# Altium PCB PCB_2021-08-01.pcbdoc
Units mil, origin at the board's own origin, x right, y up, seen from the top; angles counter-clockwise.
Board outline 6165 x 3156.77 mil, 2 copper layers (Top Layer, Bottom Layer); 22 components, 6 nets, 625 pads, 4 vias.
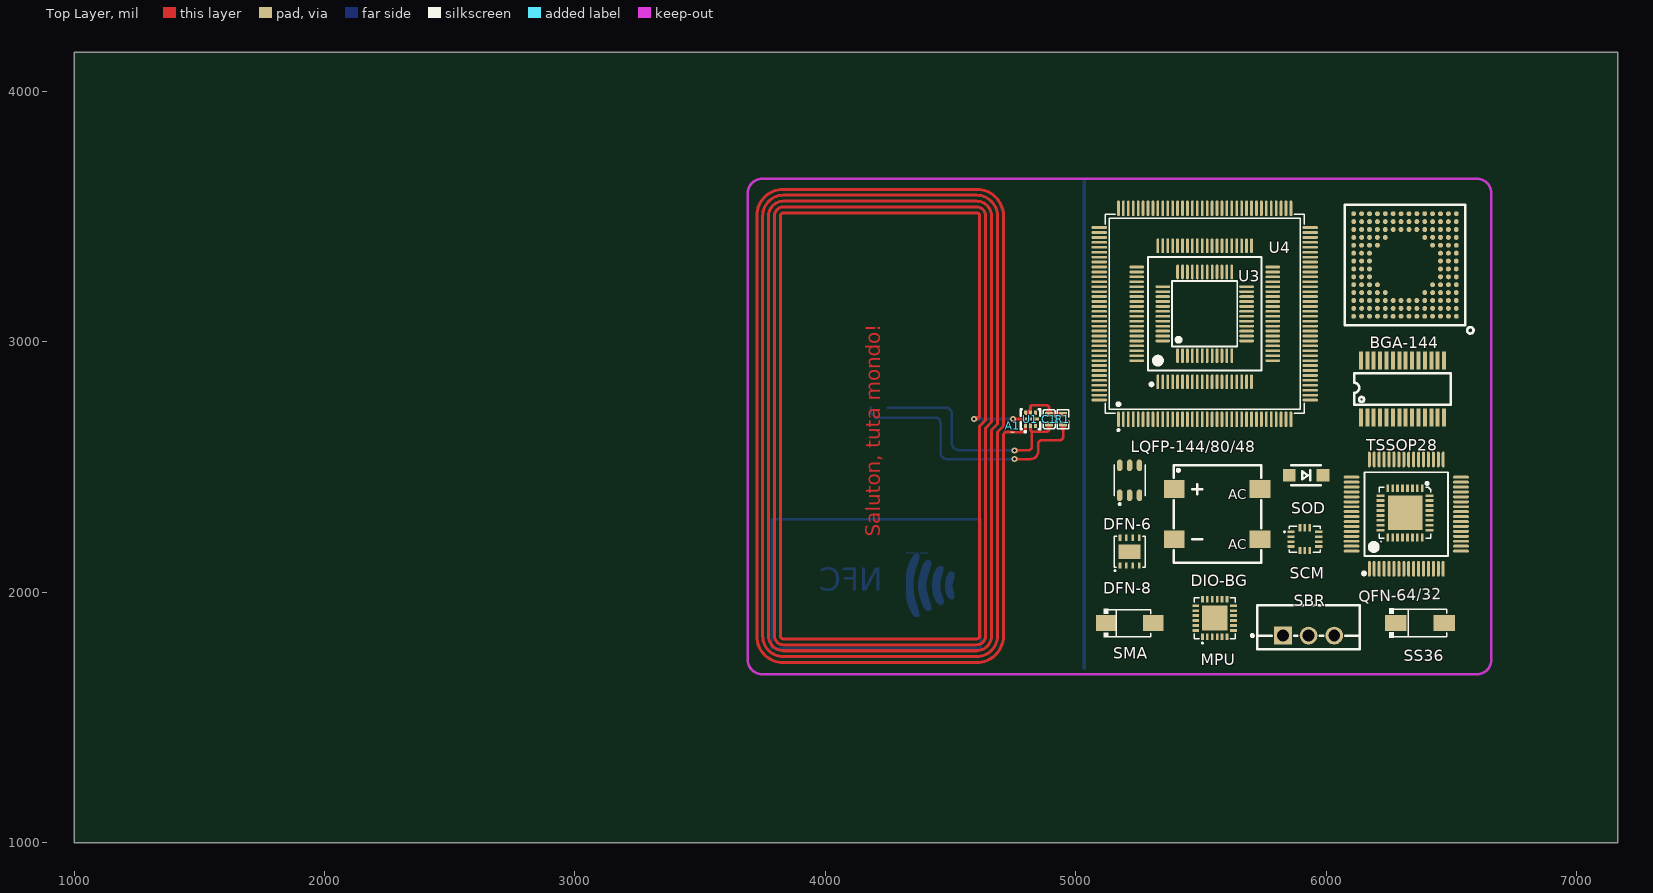
[diagram p0: Top Layer view]
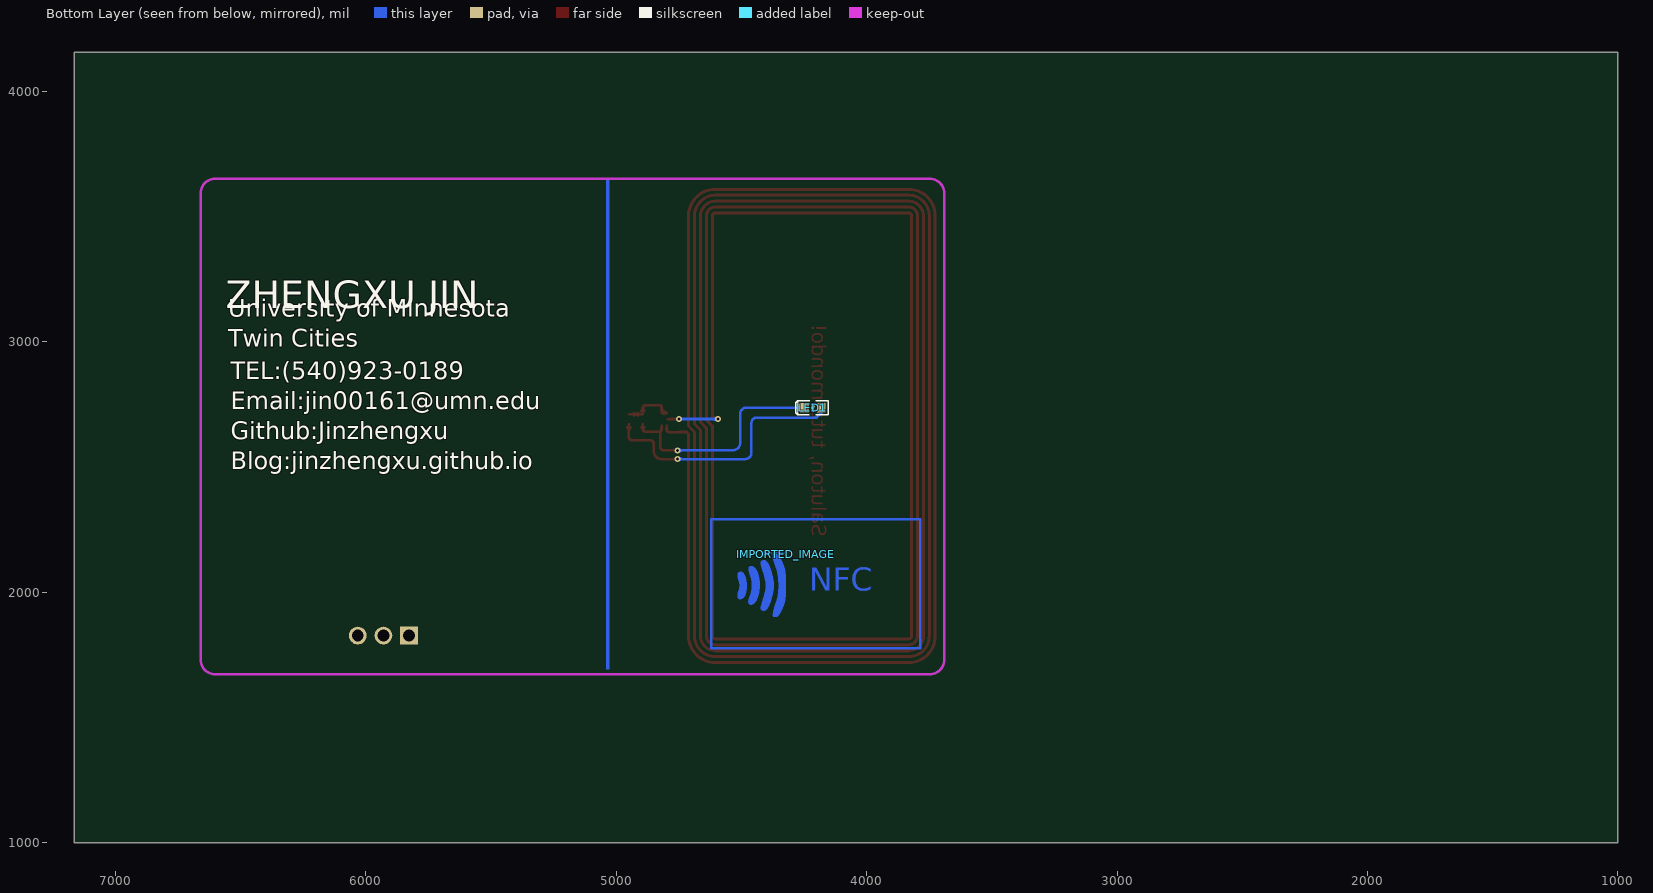
[diagram p1: Bottom Layer view, seen from below]

## Layer stack, top to bottom
Top Layer: signal copper (thickness not stored)
Dielectric: dielectric 12.6, FR-4, Dk 4.8
Bottom Layer: signal copper (thickness not stored)

## Board outline
7165,1000 1000,1000 1000,4156.77 7165,4156.77

## Components (designator, comment, footprint, x,y, rotation, side; value= is the part's Value field where it differs from the comment)
. "QFN-32_L5.0-W5.0-P0.50-BL-EP3.4" QFN-32_L5.0-W5.0-P0.50-BL-EP3.4 6315,2316.77 r180 top
A1 "NFC_ANTENNA" NFC天线 4178.84,2641.01 r180 top
BGA-144 "BGA-144_L12.1-W12.1-P0.80-BR_TMS320C5535AZHHA10" BGA-144_L12.1-W12.1-P0.80-BR_TMS320C5535AZHHA10 6315,3306.77 r0 top
C1 "0.1u" C0402 4893.84,2691.01 r270 top
DFN-6 "DFN-6_L3.0-W3.0-P1.00-BL" DFN-6_L3.0-W3.0-P1.00-BL 5215,2446.77 r0 top
DFN-8 "DFN-8_L3.0-W3.0-P0.65-BL-EP" DFN-8_L3.0-W3.0-P0.65-BL-EP 5215,2161.77 r0 top
DIO-BG "DIO-BG-TH_TTF" DIO-BG-TH_TTF 5565,2311.77 r0 top
IMPORTED_IMAGE "IMPORTED_IMAGE" IMPORTED_IMAGE 4323.05,2152.5 r0 bottom
LED1 "LED-0603_R" LED0603_RED 4215,2736.77 r180 bottom
LQFP-144/80/48 "LQFP-144_L20.0-W20.0-P0.50-LS22.0-BL" LQFP-144_L20.0-W20.0-P0.50-LS22.0-BL 5515,3111.77 r0 top
MPU "QFN-24_L4.0-W4.0-P0.50-BL-EP2.6" QFN-24_L4.0-W4.0-P0.50-BL-EP2.6 5555,1896.77 r0 top
QFN-64/32 "LQFP-64_L10.0-W10.0-P0.50-LS12.0-BL" LQFP-64_L10.0-W10.0-P0.50-LS12.0-BL 6320,2311.77 r0 top
R1 "47" R0402 4948.84,2691.01 r270 top
SBR "ITO-220AB-3_L10.2-W4.5-P2.60-L" ITO-220AB-3_L10.2-W4.5-P2.60-L 5930,1826.77 r0 top
SCM "LGA-14_L3.0-W2.5-P0.50-TL" LGA-14_L3.0-W2.5-P0.50-TL 5915,2211.77 r0 top
SMA "SMA_L4.3-W2.6-LS5.0-RD" SMA_L4.3-W2.6-LS5.0-RD 5215,1876.77 r0 top
SOD "SOD-123FL_L2.6-W1.6-LS3.4-R-RD" SOD-123FL_L2.6-W1.6-LS3.4-R-RD 5920,2466.77 r0 top
SS36 "SMA_L4.4-W2.6-LS5.0-RD" SMA_L4.4-W2.6-LS5.0-RD 6375,1876.77 r0 top
TSSOP28 "TSSOP-28_L9.8-W3.0-P0.66-LS6.4-BL" TSSOP-28_L9.8-W3.0-P0.66-LS6.4-BL 6305,2811.77 r0 top
U1 "NT3H1101W0FHKH" XQFN-8_L1.6-W1.6-P0.50-BR 4818.84,2691.01 r270 top
U3 "LQFP-48_L7.0-W7.0-P0.50-LS9.0-BL" LQFP-48_L7.0-W7.0-P0.50-LS9.0-BL 5515,3111.77 r0 top
U4 "LQFP-80_L12.0-W12.0-P0.50-LS14.0-BL" LQFP-80_L12.0-W12.0-P0.50-LS14.0-BL 5515,3111.77 r0 top

## Footprints (in the part's own frame and the unit in brackets; to place one, negate y for a bottom-side part, rotate by r counter-clockwise, add the part's x,y. Pads: shape width x height; smd on the part's side, far side on the other; paste and mask are expansions set on the pad)
BGA-144_L12.1-W12.1-P0.80-BR_TMS320C5535AZHHA10 [mm]
  round 0.5 smd: A1(5.2,-5.2) A2(4.4,-5.2) A3(3.6,-5.2) A4(2.8,-5.2) A5(2,-5.2) A6(1.2,-5.2) A7(0.4,-5.2) A8(-0.4,-5.2) A9(-1.2,-5.2) A10(-2,-5.2) A11(-2.8,-5.2) A12(-3.6,-5.2) A13(-4.4,-5.2) A14(-5.2,-5.2) B1(5.2,-4.4) B2(4.4,-4.4) B3(3.6,-4.4) B4(2.8,-4.4) B5(2,-4.4) B6(1.2,-4.4) B7(0.4,-4.4) B8(-0.4,-4.4) B9(-1.2,-4.4) B10(-2,-4.4) B11(-2.8,-4.4) B12(-3.6,-4.4) B13(-4.4,-4.4) B14(-5.2,-4.4) C1(5.2,-3.6) C2(4.4,-3.6) C3(3.6,-3.6) C4(2.8,-3.6) C5(2,-3.6) C6(1.2,-3.6) C7(0.4,-3.6) C8(-0.4,-3.6) C9(-1.2,-3.6) C10(-2,-3.6) C11(-2.8,-3.6) C12(-3.6,-3.6) C13(-4.4,-3.6) C14(-5.2,-3.6) D1(5.2,-2.8) D2(4.4,-2.8) D3(3.6,-2.8) D4(2.8,-2.8) D5(2,-2.8) D10(-2,-2.8) D11(-2.8,-2.8) D12(-3.6,-2.8) D13(-4.4,-2.8) D14(-5.2,-2.8) E1(5.2,-2) E2(4.4,-2) E3(3.6,-2) E4(2.8,-2) E11(-2.8,-2) E12(-3.6,-2) E13(-4.4,-2) E14(-5.2,-2) F1(5.2,-1.2) F2(4.4,-1.2) F3(3.6,-1.2) F12(-3.6,-1.2) F13(-4.4,-1.2) F14(-5.2,-1.2) G1(5.2,-0.4) G2(4.4,-0.4) G3(3.6,-0.4) G12(-3.6,-0.4) G13(-4.4,-0.4) G14(-5.2,-0.4) H1(5.2,0.4) H2(4.4,0.4) H3(3.6,0.4) H12(-3.6,0.4) H13(-4.4,0.4) H14(-5.2,0.4) J1(5.2,1.2) J2(4.4,1.2) J3(3.6,1.2) J12(-3.6,1.2) J13(-4.4,1.2) J14(-5.2,1.2) K1(5.2,2) K2(4.4,2) K3(3.6,2) K4(2.8,2) K11(-2.8,2) K12(-3.6,2) K13(-4.4,2) K14(-5.2,2) L1(5.2,2.8) L2(4.4,2.8) L3(3.6,2.8) L4(2.8,2.8) L5(2,2.8) L10(-2,2.8) L11(-2.8,2.8) L12(-3.6,2.8) L13(-4.4,2.8) L14(-5.2,2.8) M1(5.2,3.6) M2(4.4,3.6) M3(3.6,3.6) M4(2.8,3.6) M5(2,3.6) M6(1.2,3.6) M7(0.4,3.6) M8(-0.4,3.6) M9(-1.2,3.6) M10(-2,3.6) M11(-2.8,3.6) M12(-3.6,3.6) M13(-4.4,3.6) M14(-5.2,3.6) N1(5.2,4.4) N2(4.4,4.4) N3(3.6,4.4) N4(2.8,4.4) N5(2,4.4) N6(1.2,4.4) N7(0.4,4.4) N8(-0.4,4.4) N9(-1.2,4.4) N10(-2,4.4) N11(-2.8,4.4) N12(-3.6,4.4) N13(-4.4,4.4) N14(-5.2,4.4) P1(5.2,5.2) P2(4.4,5.2) P3(3.6,5.2) P4(2.8,5.2) P5(2,5.2) P6(1.2,5.2) P7(0.4,5.2) P8(-0.4,5.2) P9(-1.2,5.2) P10(-2,5.2) P11(-2.8,5.2) P12(-3.6,5.2) P13(-4.4,5.2) P14(-5.2,5.2)
  silkscreen extent -6.1,-6.95 6.95,6.1
C0402 [mm]
  rect 0.5x0.8 smd: 1(-0.5,0) 2(0.5,0)
  silkscreen extent -0.95,-0.6 0.95,0.6
DFN-6_L3.0-W3.0-P1.00-BL [mm]
  oval 0.56x1.185 smd: 1(-1,-1.517) 2(0,-1.517) 3(1,-1.517) 4(1,1.517) 5(0,1.517) 6(-1,1.517)
  silkscreen extent -1.58,-2.51 1.58,1.58
DFN-8_L3.0-W3.0-P0.65-BL-EP [mm]
  rect 0.28x0.625 smd: 1(-0.975,-1.412) 2(-0.325,-1.412) 3(0.325,-1.412) 4(0.975,-1.412) 5(0.975,1.412) 6(0.325,1.412) 7(-0.325,1.412) 8(-0.975,1.412)
  rect 2.25x1.5 smd: 9(0,0)
  silkscreen extent -1.58,-2.01 1.58,1.58
DIO-BG-TH_TTF [mm]
  rect 2.1x1.8 smd: 1(-4.35,2.55) 2(-4.35,-2.55) 3(4.35,-2.55) 4(4.35,2.55)
  silkscreen extent -4.4,-4.95 4.44,4.95
IMPORTED_IMAGE [mil]
  Top Layer region: 493 vertices and 0 holes, not listed, extent 0,0 51.95,251.53
  Top Layer region: 398 vertices and 0 holes, not listed, extent 47.48,24.87 99.83,226.52
  Top Layer region: 451 vertices and 0 holes, not listed, extent 104.06,48.81 148.98,202.28
  Top Layer region: 291 vertices and 0 holes, not listed, extent 155.96,71.09 192.67,180.08
ITO-220AB-3_L10.2-W4.5-P2.60-L [mm]
  rect 1.8x1.8 hole 1.2: 1(-2.6,0)
  round 1.8 hole 1.2: 2(0,0) 3(2.6,0)
  silkscreen extent -5.84,-1.4 5.2,3.1
LED0603_RED [mm]
  rect 0.9x1 smd: 1(0.85,0) 2(-0.85,0)
  silkscreen extent -1.75,-0.73 1.54,0.73
LGA-14_L3.0-W2.5-P0.50-TL [mm]
  rect 0.745x0.28 smd: 1(-1.398,0.75) 2(-1.398,0.25) 3(-1.398,-0.25) 4(-1.398,-0.75) 8(1.398,-0.75) 9(1.398,-0.25) 10(1.398,0.25) 11(1.398,0.75)
  rect 0.28x0.745 smd: 5(-0.5,-1.147) 6(0,-1.147) 7(0.5,-1.147) 12(0.5,1.147) 13(0,1.147) 14(-0.5,1.147)
  silkscreen extent -2.14,-1.33 1.58,1.33
LQFP-48_L7.0-W7.0-P0.50-LS9.0-BL [mm]
  oval 0.27x1.5 smd: 1(-2.75,-4.25) 2(-2.25,-4.25) 3(-1.75,-4.25) 4(-1.25,-4.25) 5(-0.75,-4.25) 6(-0.25,-4.25) 7(0.25,-4.25) 8(0.75,-4.25) 9(1.25,-4.25) 10(1.75,-4.25) 11(2.25,-4.25) 12(2.75,-4.25) 25(2.75,4.25) 26(2.25,4.25) 27(1.75,4.25) 28(1.25,4.25) 29(0.75,4.25) 30(0.25,4.25) 31(-0.25,4.25) 32(-0.75,4.25) 33(-1.25,4.25) 34(-1.75,4.25) 35(-2.25,4.25) 36(-2.75,4.25)
  oval 1.5x0.27 smd: 13(4.25,-2.75) 14(4.25,-2.25) 15(4.25,-1.75) 16(4.25,-1.25) 17(4.25,-0.75) 18(4.25,-0.25) 19(4.25,0.25) 20(4.25,0.75) 21(4.25,1.25) 22(4.25,1.75) 23(4.25,2.25) 24(4.25,2.75) 37(-4.25,2.75) 38(-4.25,2.25) 39(-4.25,1.75) 40(-4.25,1.25) 41(-4.25,0.75) 42(-4.25,0.25) 43(-4.25,-0.25) 44(-4.25,-0.75) 45(-4.25,-1.25) 46(-4.25,-1.75) 47(-4.25,-2.25) 48(-4.25,-2.75)
  silkscreen extent -3.33,-3.31 3.3,3.34
LQFP-64_L10.0-W10.0-P0.50-LS12.0-BL [mm]
  oval 0.3x1.6 smd: 1(-3.75,-5.55) 2(-3.25,-5.55) 3(-2.75,-5.55) 4(-2.25,-5.55) 5(-1.75,-5.55) 6(-1.25,-5.55) 7(-0.75,-5.55) 8(-0.25,-5.55) 9(0.25,-5.55) 10(0.75,-5.55) 11(1.25,-5.55) 12(1.75,-5.55) 13(2.25,-5.55) 14(2.75,-5.55) 15(3.25,-5.55) 16(3.75,-5.55) 33(3.75,5.55) 34(3.25,5.55) 35(2.75,5.55) 36(2.25,5.55) 37(1.75,5.55) 38(1.25,5.55) 39(0.75,5.55) 40(0.25,5.55) 41(-0.25,5.55) 42(-0.75,5.55) 43(-1.25,5.55) 44(-1.75,5.55) 45(-2.25,5.55) 46(-2.75,5.55) 47(-3.25,5.55) 48(-3.75,5.55)
  oval 1.6x0.3 smd: 17(5.55,-3.75) 18(5.55,-3.25) 19(5.55,-2.75) 20(5.55,-2.25) 21(5.55,-1.75) 22(5.55,-1.25) 23(5.55,-0.75) 24(5.55,-0.25) 25(5.55,0.25) 26(5.55,0.75) 27(5.55,1.25) 28(5.55,1.75) 29(5.55,2.25) 30(5.55,2.75) 31(5.55,3.25) 32(5.55,3.75) 49(-5.55,3.75) 50(-5.55,3.25) 51(-5.55,2.75) 52(-5.55,2.25) 53(-5.55,1.75) 54(-5.55,1.25) 55(-5.55,0.75) 56(-5.55,0.25) 57(-5.55,-0.25) 58(-5.55,-0.75) 59(-5.55,-1.25) 60(-5.55,-1.75) 61(-5.55,-2.25) 62(-5.55,-2.75) 63(-5.55,-3.25) 64(-5.55,-3.75)
  silkscreen extent -4.43,-6.16 4.25,4.25
LQFP-80_L12.0-W12.0-P0.50-LS14.0-BL [mm]
  oval 0.28x1.5 smd: 1(-4.75,-6.9) 2(-4.25,-6.9) 3(-3.75,-6.9) 4(-3.25,-6.9) 5(-2.75,-6.9) 6(-2.25,-6.9) 7(-1.75,-6.9) 8(-1.25,-6.9) 9(-0.75,-6.9) 10(-0.25,-6.9) 11(0.25,-6.9) 12(0.75,-6.9) 13(1.25,-6.9) 14(1.75,-6.9) 15(2.25,-6.9) 16(2.75,-6.9) 17(3.25,-6.9) 18(3.75,-6.9) 19(4.25,-6.9) 20(4.75,-6.9) 41(4.75,6.9) 42(4.25,6.9) 43(3.75,6.9) 44(3.25,6.9) 45(2.75,6.9) 46(2.25,6.9) 47(1.75,6.9) 48(1.25,6.9) 49(0.75,6.9) 50(0.25,6.9) 51(-0.25,6.9) 52(-0.75,6.9) 53(-1.25,6.9) 54(-1.75,6.9) 55(-2.25,6.9) 56(-2.75,6.9) 57(-3.25,6.9) 58(-3.75,6.9) 59(-4.25,6.9) 60(-4.75,6.9)
  oval 1.5x0.28 smd: 21(6.9,-4.75) 22(6.9,-4.25) 23(6.9,-3.75) 24(6.9,-3.25) 25(6.9,-2.75) 26(6.9,-2.25) 27(6.9,-1.75) 28(6.9,-1.25) 29(6.9,-0.75) 30(6.9,-0.25) 31(6.9,0.25) 32(6.9,0.75) 33(6.9,1.25) 34(6.9,1.75) 35(6.9,2.25) 36(6.9,2.75) 37(6.9,3.25) 38(6.9,3.75) 39(6.9,4.25) 40(6.9,4.75) 61(-6.9,4.75) 62(-6.9,4.25) 63(-6.9,3.75) 64(-6.9,3.25) 65(-6.9,2.75) 66(-6.9,2.25) 67(-6.9,1.75) 68(-6.9,1.25) 69(-6.9,0.75) 70(-6.9,0.25) 71(-6.9,-0.25) 72(-6.9,-0.75) 73(-6.9,-1.25) 74(-6.9,-1.75) 75(-6.9,-2.25) 76(-6.9,-2.75) 77(-6.9,-3.25) 78(-6.9,-3.75) 79(-6.9,-4.25) 80(-6.9,-4.75)
  silkscreen extent -5.75,-7.3 5.75,5.75
LQFP-144_L20.0-W20.0-P0.50-LS22.0-BL [mm]
  oval 0.28x1.6 smd: 1(-8.75,-10.7) 2(-8.25,-10.7) 3(-7.75,-10.7) 4(-7.25,-10.7) 5(-6.75,-10.7) 6(-6.25,-10.7) 7(-5.75,-10.7) 8(-5.25,-10.7) 9(-4.75,-10.7) 10(-4.25,-10.7) 11(-3.75,-10.7) 12(-3.25,-10.7) 13(-2.75,-10.7) 14(-2.25,-10.7) 15(-1.75,-10.7) 16(-1.25,-10.7) 17(-0.75,-10.7) 18(-0.25,-10.7) 19(0.25,-10.7) 20(0.75,-10.7) 21(1.25,-10.7) 22(1.75,-10.7) 23(2.25,-10.7) 24(2.75,-10.7) 25(3.25,-10.7) 26(3.75,-10.7) 27(4.25,-10.7) 28(4.75,-10.7) 29(5.25,-10.7) 30(5.75,-10.7) 31(6.25,-10.7) 32(6.75,-10.7) 33(7.25,-10.7) 34(7.75,-10.7) 35(8.25,-10.7) 36(8.75,-10.7) 73(8.75,10.7) 74(8.25,10.7) 75(7.75,10.7) 76(7.25,10.7) 77(6.75,10.7) 78(6.25,10.7) 79(5.75,10.7) 80(5.25,10.7) 81(4.75,10.7) 82(4.25,10.7) 83(3.75,10.7) 84(3.25,10.7) 85(2.75,10.7) 86(2.25,10.7) 87(1.75,10.7) 88(1.25,10.7) 89(0.75,10.7) 90(0.25,10.7) 91(-0.25,10.7) 92(-0.75,10.7) 93(-1.25,10.7) 94(-1.75,10.7) 95(-2.25,10.7) 96(-2.75,10.7) 97(-3.25,10.7) 98(-3.75,10.7) 99(-4.25,10.7) 100(-4.75,10.7) 101(-5.25,10.7) 102(-5.75,10.7) 103(-6.25,10.7) 104(-6.75,10.7) 105(-7.25,10.7) 106(-7.75,10.7) 107(-8.25,10.7) 108(-8.75,10.7)
  oval 1.6x0.28 smd: 37(10.7,-8.75) 38(10.7,-8.25) 39(10.7,-7.75) 40(10.7,-7.25) 41(10.7,-6.75) 42(10.7,-6.25) 43(10.7,-5.75) 44(10.7,-5.25) 45(10.7,-4.75) 46(10.7,-4.25) 47(10.7,-3.75) 48(10.7,-3.25) 49(10.7,-2.75) 50(10.7,-2.25) 51(10.7,-1.75) 52(10.7,-1.25) 53(10.7,-0.75) 54(10.7,-0.25) 55(10.7,0.25) 56(10.7,0.75) 57(10.7,1.25) 58(10.7,1.75) 59(10.7,2.25) 60(10.7,2.75) 61(10.7,3.25) 62(10.7,3.75) 63(10.7,4.25) 64(10.7,4.75) 65(10.7,5.25) 66(10.7,5.75) 67(10.7,6.25) 68(10.7,6.75) 69(10.7,7.25) 70(10.7,7.75) 71(10.7,8.25) 72(10.7,8.75) 109(-10.7,8.75) 110(-10.7,8.25) 111(-10.7,7.75) 112(-10.7,7.25) 113(-10.7,6.75) 114(-10.7,6.25) 115(-10.7,5.75) 116(-10.7,5.25) 117(-10.7,4.75) 118(-10.7,4.25) 119(-10.7,3.75) 120(-10.7,3.25) 121(-10.7,2.75) 122(-10.7,2.25) 123(-10.7,1.75) 124(-10.7,1.25) 125(-10.7,0.75) 126(-10.7,0.25) 127(-10.7,-0.25) 128(-10.7,-0.75) 129(-10.7,-1.25) 130(-10.7,-1.75) 131(-10.7,-2.25) 132(-10.7,-2.75) 133(-10.7,-3.25) 134(-10.7,-3.75) 135(-10.7,-4.25) 136(-10.7,-4.75) 137(-10.7,-5.25) 138(-10.7,-5.75) 139(-10.7,-6.25) 140(-10.7,-6.75) 141(-10.7,-7.25) 142(-10.7,-7.75) 143(-10.7,-8.25) 144(-10.7,-8.75)
  silkscreen extent -10.08,-11.9 10.08,10.08
NFC天线 [mm]
  rect 0.4x0.2 smd: 1(-14.462,0.055) 2(-14.478,-1.27)
  Top Layer lines w0.305: 10.9,20.72 10.9,-21.89 cw(c8.795,-21.894) 8.8,-23.998 -10.805,-23.998 cw(c-10.805,-21.89) -12.913,-21.89 -12.913,-0.783 -12.303,-0.18 -12.303,20.72 cw(c-10.804,20.721) -10.805,22.22 8.8,22.22 cw(c8.8,20.72) 10.3,20.72 10.3,-21.89 cw(c8.8,-21.89) 8.8,-23.389 -10.805,-23.389 cw(c-10.805,-21.89) -12.303,-21.89 -12.303,-0.986 -11.719,-0.38 -11.719,20.72 cw(c-10.812,20.713) -10.805,21.62 8.8,21.62 cw(c8.8,20.72) 9.7,20.72 9.7,-21.89 cw(c8.792,-21.897) 8.8,-22.805 -10.805,-22.805 cw(c-10.805,-21.89) -11.719,-21.89 -11.719,-1.189 -11.11,-0.58 -11.11,20.72 cw(c-10.807,20.718) -10.805,21.02 8.8,21.02 cw(c8.8,20.72) 9.1,20.72 9.099,-21.89 cw(c8.797,-21.893) 8.8,-22.195 -10.805,-22.195 cw(c-10.805,-21.89) -11.11,-21.89 -11.11,-1.547 -10.77,-1.206 -10.706,-1.27 -10.541,-1.27 ; 10.9,20.72 ccw(c8.8,20.72) 8.8,22.82 -10.805,22.82 ccw(c-10.809,20.716) -12.913,20.72 -12.913,0.02 -13.523,-0.58 -13.523,-21.89 ccw(c-10.818,-21.878) -10.805,-24.583 8.8,-24.583 ccw(c8.803,-21.886) 11.5,-21.89 11.5,20.72 ccw(c8.8,20.72) 8.8,23.42 -10.805,23.42 ccw(c-10.814,20.711) -13.523,20.72 -13.523,0.22 -13.675,0.055 -14.335,0.055 -14.462,0.055
  Bottom Layer lines w0.305: -10.541,-1.27 -14.478,-1.27
QFN-24_L4.0-W4.0-P0.50-BL-EP2.6 [mm]
  rect 0.28x0.665 smd: 1(-1.25,-1.907) 2(-0.75,-1.907) 3(-0.25,-1.907) 4(0.25,-1.907) 5(0.75,-1.907) 6(1.25,-1.907) 13(1.25,1.907) 14(0.75,1.907) 15(0.25,1.907) 16(-0.25,1.907) 17(-0.75,1.907) 18(-1.25,1.907)
  rect 0.665x0.28 smd: 7(1.907,-1.25) 8(1.907,-0.75) 9(1.907,-0.25) 10(1.907,0.25) 11(1.907,0.75) 12(1.907,1.25) 19(-1.907,1.25) 20(-1.907,0.75) 21(-1.907,0.25) 22(-1.907,-0.25) 23(-1.907,-0.75) 24(-1.907,-1.25)
  rect 2.55x2.55 smd: 25(0,0)
  silkscreen extent -2.08,-2.61 2.08,2.08
QFN-32_L5.0-W5.0-P0.50-BL-EP3.4 [mm]
  rect 0.28x0.8 smd: 1(-1.75,-2.5) 2(-1.251,-2.5) 3(-0.751,-2.5) 4(-0.251,-2.5) 5(0.249,-2.5) 6(0.749,-2.5) 7(1.249,-2.5) 8(1.749,-2.5) 17(1.752,2.5) 18(1.251,2.5) 19(0.752,2.5) 20(0.251,2.5) 21(-0.248,2.5) 22(-0.749,2.5) 23(-1.248,2.5) 24(-1.749,2.5)
  rect 0.8x0.28 smd: 9(2.5,-1.748) 10(2.5,-1.248) 11(2.5,-0.748) 12(2.5,-0.248) 13(2.5,0.252) 14(2.5,0.752) 15(2.5,1.252) 16(2.5,1.752) 25(-2.5,1.75) 26(-2.5,1.25) 27(-2.5,0.75) 28(-2.5,0.25) 29(-2.5,-0.25) 30(-2.5,-0.75) 31(-2.5,-1.25) 32(-2.5,-1.75)
  rect 3.5x3.5 smd: 33(0,0)
  silkscreen extent -2.6,-3.12 2.6,2.6
R0402 [mm]
  rect 0.5x0.8 smd: 1(-0.5,0) 2(0.5,0)
  silkscreen extent -0.95,-0.6 0.95,0.6
SMA_L4.3-W2.6-LS5.0-RD [mm]
  rect 2.046x1.62 smd: 1(-2.404,-0.009) 2(2.404,0.009)
  silkscreen extent -2.61,-1.44 2.16,1.44
SMA_L4.4-W2.6-LS5.0-RD [mm]
  rect 2.185x1.593 smd: 1(-2.442,0) 2(2.442,0)
  silkscreen extent -3.11,-1.48 2.73,1.48
SOD-123FL_L2.6-W1.6-LS3.4-R-RD [mm]
  rect 1.3x1.3 smd: 1(1.7,0) 2(-1.7,0)
  silkscreen extent -1.5,-1 1.5,1
TSSOP-28_L9.8-W3.0-P0.66-LS6.4-BL [mil]
  rect 16x71 smd: 1(-166.5,-114) 2(-140.5,-114) 3(-115.5,-114) 4(-89.5,-114) 5(-63.5,-114) 6(-38.5,-114) 7(-12.5,-114) 8(12.5,-114) 9(38.5,-114) 10(64.5,-114) 11(89.5,-114) 12(115.5,-114) 13(140.5,-114) 14(166.5,-114) 15(166.5,114) 16(140.5,114) 17(115.5,114) 18(89.5,114) 19(64.5,114) 20(38.5,114) 21(12.5,114) 22(-12.5,114) 23(-38.5,114) 24(-63.5,114) 25(-89.5,114) 26(-115.5,114) 27(-140.5,114) 28(-166.5,114)
  silkscreen extent -193,-63 193,63
XQFN-8_L1.6-W1.6-P0.50-BR [mm]
  rect 0.5x0.3 smd: 1(0.65,-0.5) 2(0.65,0) 3(0.65,0.5) 5(-0.65,0.5) 6(-0.65,0) 7(-0.65,-0.5)
  rect 0.3x0.5 smd: 4(0,0.6) 8(0,-0.6)
  rect 0.3x0.3 smd: 9(0,0)
  silkscreen extent -1,-1 1.33,1

## Via types
v1: diameter 24, hole 12, Top Layer to Bottom Layer, 4 vias

## Nets (pads, with @x,y where several pads share a name; then routed paths per layer and width w, separated by ;. In a path a pad name is that pad's centre, name@x,y a point inside that pad or via, vN(x,y) a via of type N, cw(c..) or ccw(c..) an arc to the next point about the centre after c; other vN are vias at no path point)
LA: A1.1 U1.1 | length 72.2
  Top Layer w10: A1.1@4748.2,2638.87 4786.7,2638.87 ; 4786.66,2638.83 ccw(c4786.66,2651.01) 4798.84,2651.01 ; 4798.8,2650.97 U1.1@4798.8,2665.07 ; U1.1@4798.84,2665.11 cw(c4799.15,2665.11) U1.1
LB: A1.2 U1.8 | length 46.4
  Top Layer w10: v1(4748.84,2691.01) U1.8
R1_2: LED1.1 R1.2 | length 1057.8
  Top Layer w10: v1(4755,2531.77) 4820,2531.77 ccw(c4820,2561.77) 4850,2561.77 4850,2591.77 cw(c4865,2591.77) 4865,2606.77 4935,2606.77 ccw(c4935,2621.77) 4950,2621.77 4950,2670.17 ccw(c4948.84,2670.16) R1.2
  Bottom Layer w10: LED1.1 4181.53,2715.24 4200,2696.77 4440,2696.77 cw(c4440,2676.77) 4460,2676.77 4460,2556.77 ccw(c4485,2556.77) 4485,2531.77 v1(4755,2531.77)
S$260: 
U1_2: C1.2 LED1.2 U1.2 | length 917.8
  Top Layer w10: v1(4755,2566.77) 4810,2566.77 ccw(c4810,2581.77) 4825,2581.77 4825,2641.11 cw(c4825.48,2641.11) 4825.48,2641.59 ; 4818.8,2650.97 U1.2 ; 4818.84,2651.01 ccw(c4828.84,2651.01) 4828.84,2641.01 4883.84,2641.01 ccw(c4883.84,2651.01) 4893.84,2651.01 ; 4893.8,2650.97 C1.2@4893.8,2671.37
  Bottom Layer w10: LED1.2 4415,2736.77 4420,2736.77 4480,2736.77 ; 4480.13,2736.9 cw(c4480.13,2711.9) 4505.13,2711.9 ; 4505,2716.77 4505,2656.77 4505,2596.77 ccw(c4535,2596.77) 4535,2566.77 v1(4755,2566.77)
U1_6: C1.1 R1.1 U1.6 U1.7 | length 207.9
  Top Layer w10: U1.7 U1.6 4818.8,2740.97 ; 4818.84,2741.01 cw(c4823.84,2741.01) 4823.84,2746.01 4883.84,2746.01 cw(c4883.84,2736.01) 4893.84,2736.01 ; 4893.8,2735.97 C1.1 R1.1
pads on no net: ..1 ..2 ..3 ..4 ..5 ..6 ..7 ..8 ..9 ..10 ..11 ..12 ..13 ..14 ..15 ..16 ..17 ..18 ..19 ..20 ..21 ..22 ..23 ..24 ..25 ..26 ..27 ..28 ..29 ..30 ..31 ..32 ..33 BGA-144.A1 BGA-144.A2 BGA-144.A3 BGA-144.A4 BGA-144.A5 BGA-144.A6 BGA-144.A7 BGA-144.A8 BGA-144.A9 BGA-144.A10 BGA-144.A11 BGA-144.A12 BGA-144.A13 BGA-144.A14 BGA-144.B1 BGA-144.B2 BGA-144.B3 BGA-144.B4 BGA-144.B5 BGA-144.B6 BGA-144.B7 BGA-144.B8 BGA-144.B9 BGA-144.B10 BGA-144.B11 BGA-144.B12 BGA-144.B13 BGA-144.B14 BGA-144.C1 BGA-144.C2 BGA-144.C3 BGA-144.C4 BGA-144.C5 BGA-144.C6 BGA-144.C7 BGA-144.C8 BGA-144.C9 BGA-144.C10 BGA-144.C11 BGA-144.C12 BGA-144.C13 BGA-144.C14 BGA-144.D1 BGA-144.D2 BGA-144.D3 BGA-144.D4 BGA-144.D5 BGA-144.D10 BGA-144.D11 BGA-144.D12 BGA-144.D13 BGA-144.D14 BGA-144.E1 BGA-144.E2 BGA-144.E3 BGA-144.E4 BGA-144.E11 BGA-144.E12 BGA-144.E13 BGA-144.E14 BGA-144.F1 BGA-144.F2 BGA-144.F3 BGA-144.F12 BGA-144.F13 BGA-144.F14 BGA-144.G1 BGA-144.G2 BGA-144.G3 BGA-144.G12 BGA-144.G13 BGA-144.G14 BGA-144.H1 BGA-144.H2 BGA-144.H3 BGA-144.H12 BGA-144.H13 BGA-144.H14 BGA-144.J1 BGA-144.J2 BGA-144.J3 BGA-144.J12 BGA-144.J13 BGA-144.J14 BGA-144.K1 BGA-144.K2 BGA-144.K3 BGA-144.K4 BGA-144.K11 BGA-144.K12 BGA-144.K13 BGA-144.K14 BGA-144.L1 BGA-144.L2 BGA-144.L3 BGA-144.L4 BGA-144.L5 BGA-144.L10 BGA-144.L11 BGA-144.L12 BGA-144.L13 BGA-144.L14 BGA-144.M1 BGA-144.M2 BGA-144.M3 BGA-144.M4 BGA-144.M5 BGA-144.M6 BGA-144.M7 BGA-144.M8 BGA-144.M9 BGA-144.M10 BGA-144.M11 BGA-144.M12 BGA-144.M13 BGA-144.M14 BGA-144.N1 BGA-144.N2 BGA-144.N3 BGA-144.N4 BGA-144.N5 BGA-144.N6 BGA-144.N7 BGA-144.N8 BGA-144.N9 BGA-144.N10 BGA-144.N11 BGA-144.N12 BGA-144.N13 BGA-144.N14 BGA-144.P1 BGA-144.P2 BGA-144.P3 BGA-144.P4 BGA-144.P5 BGA-144.P6 BGA-144.P7 BGA-144.P8 BGA-144.P9 BGA-144.P10 BGA-144.P11 BGA-144.P12 BGA-144.P13 BGA-144.P14 DFN-6.1 DFN-6.2 DFN-6.3 DFN-6.4 DFN-6.5 DFN-6.6 DFN-8.1 DFN-8.2 DFN-8.3 DFN-8.4 DFN-8.5 DFN-8.6 DFN-8.7 DFN-8.8 DFN-8.9 DIO-BG.1 DIO-BG.2 DIO-BG.3 DIO-BG.4 LQFP-144/80/48.1 LQFP-144/80/48.2 LQFP-144/80/48.3 LQFP-144/80/48.4 LQFP-144/80/48.5 LQFP-144/80/48.6 LQFP-144/80/48.7 LQFP-144/80/48.8 LQFP-144/80/48.9 LQFP-144/80/48.10 LQFP-144/80/48.11 LQFP-144/80/48.12 LQFP-144/80/48.13 LQFP-144/80/48.14 LQFP-144/80/48.15 LQFP-144/80/48.16 LQFP-144/80/48.17 LQFP-144/80/48.18 LQFP-144/80/48.19 LQFP-144/80/48.20 LQFP-144/80/48.21 LQFP-144/80/48.22 LQFP-144/80/48.23 LQFP-144/80/48.24 LQFP-144/80/48.25 LQFP-144/80/48.26 LQFP-144/80/48.27 LQFP-144/80/48.28 LQFP-144/80/48.29 LQFP-144/80/48.30 LQFP-144/80/48.31 LQFP-144/80/48.32 LQFP-144/80/48.33 LQFP-144/80/48.34 LQFP-144/80/48.35 LQFP-144/80/48.36 LQFP-144/80/48.37 LQFP-144/80/48.38 LQFP-144/80/48.39 LQFP-144/80/48.40 LQFP-144/80/48.41 LQFP-144/80/48.42 LQFP-144/80/48.43 LQFP-144/80/48.44 LQFP-144/80/48.45 LQFP-144/80/48.46 LQFP-144/80/48.47 LQFP-144/80/48.48 LQFP-144/80/48.49 LQFP-144/80/48.50 LQFP-144/80/48.51 LQFP-144/80/48.52 LQFP-144/80/48.53 LQFP-144/80/48.54 LQFP-144/80/48.55 LQFP-144/80/48.56 LQFP-144/80/48.57 LQFP-144/80/48.58 LQFP-144/80/48.59 LQFP-144/80/48.60 LQFP-144/80/48.61 LQFP-144/80/48.62 LQFP-144/80/48.63 LQFP-144/80/48.64 LQFP-144/80/48.65 LQFP-144/80/48.66 LQFP-144/80/48.67 LQFP-144/80/48.68 LQFP-144/80/48.69 LQFP-144/80/48.70 LQFP-144/80/48.71 LQFP-144/80/48.72 LQFP-144/80/48.73 LQFP-144/80/48.74 LQFP-144/80/48.75 LQFP-144/80/48.76 LQFP-144/80/48.77 LQFP-144/80/48.78 LQFP-144/80/48.79 LQFP-144/80/48.80 LQFP-144/80/48.81 LQFP-144/80/48.82 LQFP-144/80/48.83 LQFP-144/80/48.84 LQFP-144/80/48.85 LQFP-144/80/48.86 LQFP-144/80/48.87 LQFP-144/80/48.88 LQFP-144/80/48.89 LQFP-144/80/48.90 LQFP-144/80/48.91 LQFP-144/80/48.92 LQFP-144/80/48.93 LQFP-144/80/48.94 LQFP-144/80/48.95 LQFP-144/80/48.96 LQFP-144/80/48.97 LQFP-144/80/48.98 LQFP-144/80/48.99 LQFP-144/80/48.100 LQFP-144/80/48.101 LQFP-144/80/48.102 LQFP-144/80/48.103 LQFP-144/80/48.104 LQFP-144/80/48.105 LQFP-144/80/48.106 LQFP-144/80/48.107 LQFP-144/80/48.108 LQFP-144/80/48.109 LQFP-144/80/48.110 LQFP-144/80/48.111 LQFP-144/80/48.112 LQFP-144/80/48.113 LQFP-144/80/48.114 LQFP-144/80/48.115 LQFP-144/80/48.116 LQFP-144/80/48.117 LQFP-144/80/48.118 LQFP-144/80/48.119 LQFP-144/80/48.120 LQFP-144/80/48.121 LQFP-144/80/48.122 LQFP-144/80/48.123 LQFP-144/80/48.124 LQFP-144/80/48.125 LQFP-144/80/48.126 LQFP-144/80/48.127 LQFP-144/80/48.128 LQFP-144/80/48.129 LQFP-144/80/48.130 LQFP-144/80/48.131 LQFP-144/80/48.132 LQFP-144/80/48.133 LQFP-144/80/48.134 LQFP-144/80/48.135 LQFP-144/80/48.136 LQFP-144/80/48.137 LQFP-144/80/48.138 LQFP-144/80/48.139 LQFP-144/80/48.140 LQFP-144/80/48.141 LQFP-144/80/48.142 LQFP-144/80/48.143 LQFP-144/80/48.144 MPU.1 MPU.2 MPU.3 MPU.4 MPU.5 MPU.6 MPU.7 MPU.8 MPU.9 MPU.10 MPU.11 MPU.12 MPU.13 MPU.14 MPU.15 MPU.16 MPU.17 MPU.18 MPU.19 MPU.20 MPU.21 MPU.22 MPU.23 MPU.24 MPU.25 QFN-64/32.1 QFN-64/32.2 QFN-64/32.3 QFN-64/32.4 QFN-64/32.5 QFN-64/32.6 QFN-64/32.7 QFN-64/32.8 QFN-64/32.9 QFN-64/32.10 QFN-64/32.11 QFN-64/32.12 QFN-64/32.13 QFN-64/32.14 QFN-64/32.15 QFN-64/32.16 QFN-64/32.17 QFN-64/32.18 QFN-64/32.19 QFN-64/32.20 QFN-64/32.21 QFN-64/32.22 QFN-64/32.23 QFN-64/32.24 QFN-64/32.25 QFN-64/32.26 QFN-64/32.27 QFN-64/32.28 QFN-64/32.29 QFN-64/32.30 QFN-64/32.31 QFN-64/32.32 QFN-64/32.33 QFN-64/32.34 QFN-64/32.35 QFN-64/32.36 QFN-64/32.37 QFN-64/32.38 QFN-64/32.39 QFN-64/32.40 QFN-64/32.41 QFN-64/32.42 QFN-64/32.43 QFN-64/32.44 QFN-64/32.45 QFN-64/32.46 QFN-64/32.47 QFN-64/32.48 QFN-64/32.49 QFN-64/32.50 QFN-64/32.51 QFN-64/32.52 QFN-64/32.53 QFN-64/32.54 QFN-64/32.55 QFN-64/32.56 QFN-64/32.57 QFN-64/32.58 QFN-64/32.59 QFN-64/32.60 QFN-64/32.61 QFN-64/32.62 QFN-64/32.63 QFN-64/32.64 SBR.1 SBR.2 SBR.3 SCM.1 SCM.2 SCM.3 SCM.4 SCM.5 SCM.6 SCM.7 SCM.8 SCM.9 SCM.10 SCM.11 SCM.12 SCM.13 SCM.14 SMA.1 SMA.2 SOD.1 SOD.2 SS36.1 SS36.2 TSSOP28.1 TSSOP28.2 TSSOP28.3 TSSOP28.4 TSSOP28.5 TSSOP28.6 TSSOP28.7 TSSOP28.8 TSSOP28.9 TSSOP28.10 TSSOP28.11 TSSOP28.12 TSSOP28.13 TSSOP28.14 TSSOP28.15 TSSOP28.16 TSSOP28.17 TSSOP28.18 TSSOP28.19 TSSOP28.20 TSSOP28.21 TSSOP28.22 TSSOP28.23 TSSOP28.24 TSSOP28.25 TSSOP28.26 TSSOP28.27 TSSOP28.28 U1.3 U1.4 U1.5 U1.9 U3.1 U3.2 U3.3 U3.4 U3.5 U3.6 U3.7 U3.8 U3.9 U3.10 U3.11 U3.12 U3.13 U3.14 U3.15 U3.16 U3.17 U3.18 U3.19 U3.20 U3.21 U3.22 U3.23 U3.24 U3.25 U3.26 U3.27 U3.28 U3.29 U3.30 U3.31 U3.32 U3.33 U3.34 U3.35 U3.36 U3.37 U3.38 U3.39 U3.40 U3.41 U3.42 U3.43 U3.44 U3.45 U3.46 U3.47 U3.48 U4.1 U4.2 U4.3 U4.4 U4.5 U4.6 U4.7 U4.8 U4.9 U4.10 U4.11 U4.12 U4.13 U4.14 U4.15 U4.16 U4.17 U4.18 U4.19 U4.20 U4.21 U4.22 U4.23 U4.24 U4.25 U4.26 U4.27 U4.28 U4.29 U4.30 U4.31 U4.32 U4.33 U4.34 U4.35 U4.36 U4.37 U4.38 U4.39 U4.40 U4.41 U4.42 U4.43 U4.44 U4.45 U4.46 U4.47 U4.48 U4.49 U4.50 U4.51 U4.52 U4.53 U4.54 U4.55 U4.56 U4.57 U4.58 U4.59 U4.60 U4.61 U4.62 U4.63 U4.64 U4.65 U4.66 U4.67 U4.68 U4.69 U4.70 U4.71 U4.72 U4.73 U4.74 U4.75 U4.76 U4.77 U4.78 U4.79 U4.80
copper on no net: | length 2700
  Bottom Layer w10: 3785,1776.77 4620,1776.77 4620,2291.77 3785,2291.77 3785,1776.77
  other v1: 4593.84,2691.01

## Keep-outs
Keep-Out Layer:
  lines w10: 3690,1730.83 ccw(c3749.05,1730.83) 3749.05,1671.77 ; 3690,3592.72 cw(c3749.05,3592.72) 3749.05,3651.77 ; 6600.94,1671.77 ccw(c6600.94,1730.83) 6660,1730.83 ; 6600.94,3651.77 cw(c6600.94,3592.72) 6660,3592.72

## Other copper
Top Layer:
  region net LA: 4805.06,2655.58 4793.25,2655.58 4793.8,2650.97 4803.8,2650.97
  region net U1_2: 4824.75,2655.58 4812.93,2655.58 4813.8,2650.97 4823.8,2650.97
  region net U1_6: 4812.93,2706.76 4812.93,2726.44 4799.2,2721.57 4799.2,2711.57
  region net U1_6: 4812.93,2726.44 4824.75,2726.44 4823.8,2740.97 4813.8,2740.97
  region net U1_6: 4805.06,2726.44 4805.06,2706.76 4818.8,2711.57 4818.8,2721.57
  region net LB: 4785.38,2685.11 4785.38,2696.91 4770.38,2695.97 4770.38,2685.97
  region net U1_2: 4906.3,2661.48 4881.3,2661.48 4888.8,2650.97 4898.8,2650.97
  region net U1_6: 4909.59,2720.53 4909.59,2700.85 4924.59,2705.67 4924.59,2715.67
  region net U1_6: 4881.3,2720.53 4906.3,2720.53 4898.8,2735.53 4888.8,2735.53
  region net U1_6: 4933.09,2700.85 4933.09,2720.53 4918.09,2715.67 4918.09,2705.67
  region net R1_2: 4962.5,2661.48 4937.5,2661.48 4945,2646.48 4955,2646.48
  region net R1_2: 4762.94,2522.77 4762.94,2540.77 4771.34,2536.77 4771.34,2526.77
  region net U1_2: 4762.94,2557.77 4762.94,2575.77 4771.34,2571.77 4771.34,2561.77
  region net LB: 4756.8,2699.99 4756.75,2681.99 4765.16,2685.97 4765.19,2695.97
  region: 4603.85,2684.39 4599.15,2701.77 4607.8,2701.95 4611.41,2688.59
  text "Saluton, tuta mondo!" at 4240,2221.77 h100 r90
Bottom Layer:
  region net R1_2: 4747.06,2522.77 4747.06,2540.77 4738.66,2536.77 4738.66,2526.77
  region net U1_2: 4747.06,2557.77 4747.06,2575.77 4738.66,2571.77 4738.66,2561.77
  region: 4601.78,2682.01 4601.77,2700.01 4610.18,2697.01 4610.17,2685
  rectangle: 5027.5,1691.77 5040,3646.77
  text "NFC" at 4230,1976.77 h157.48

## Silkscreen, mask and mechanical layers (free items; w line width, h text height)
Bottom Overlay:
  text "ZHENGXU JIN" at 6560,3096.77 h190
  text "University of Minnesota / Twin Cities" at 6550,2956.77 h120
  text "TEL:(540)923-0189 / Email:jin00161@umn.edu / Github:Jinzhengxu / Blog:jinzhengxu.github.io" at 6540,2466.77 h120
Top Solder:
  text "Saluton, tuta mondo!" at 4240,2221.77 h100 r90
Bottom Solder:
  text "★" at 4250,2791.77 h80 r90

## Text inside footprints (layer, text, board x,y; h text height)
DIO-BG: Top Overlay "AC" at 5610,2172.09 h39.37; Top Overlay "AC" at 5610,2372.09 h39.37